# Altium PCB squareatron.PcbDoc
Units mm, origin at the board's own origin, x right, y up, seen from the top; angles counter-clockwise.
Board outline 60 x 50.05 mm, 2 copper layers (Top Layer, Bottom Layer), stack 1.58 mm thick; 51 components, 26 nets, 162 pads, 98 vias.
Unrouted connection lines stored in the file: 4.
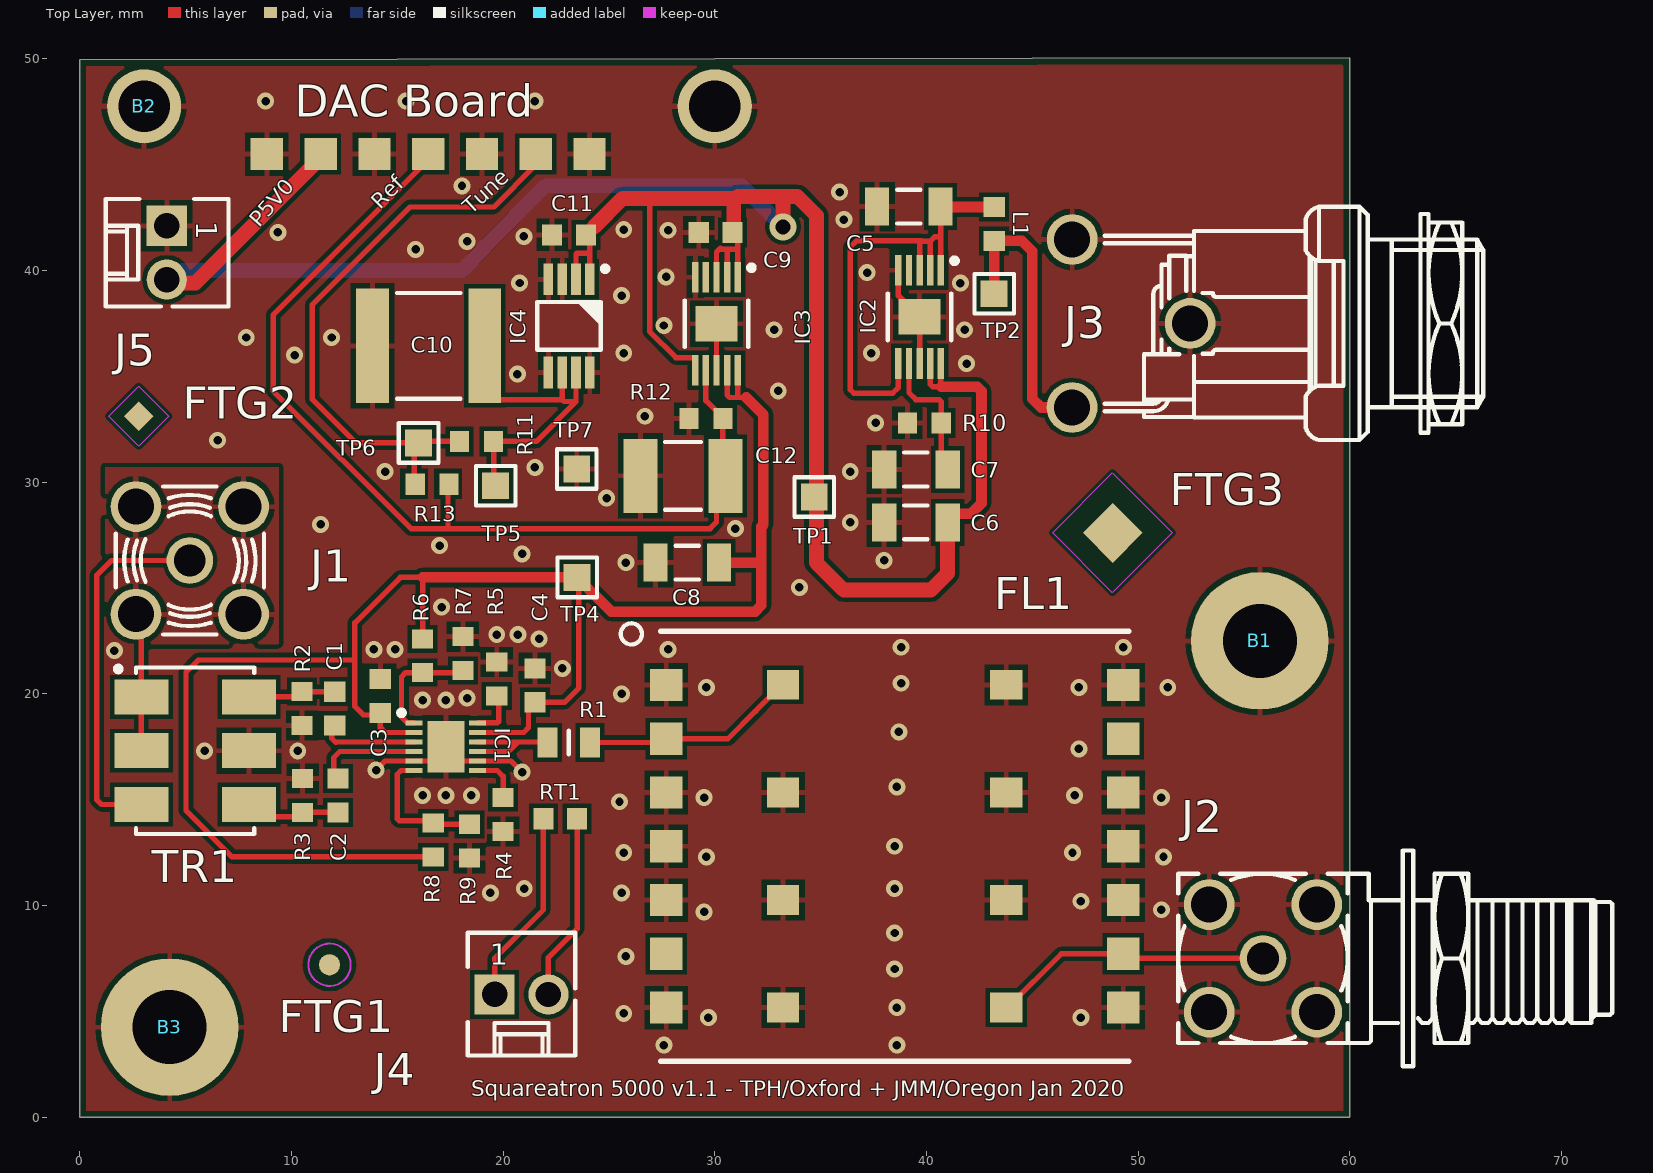
[diagram p0: Top Layer view]
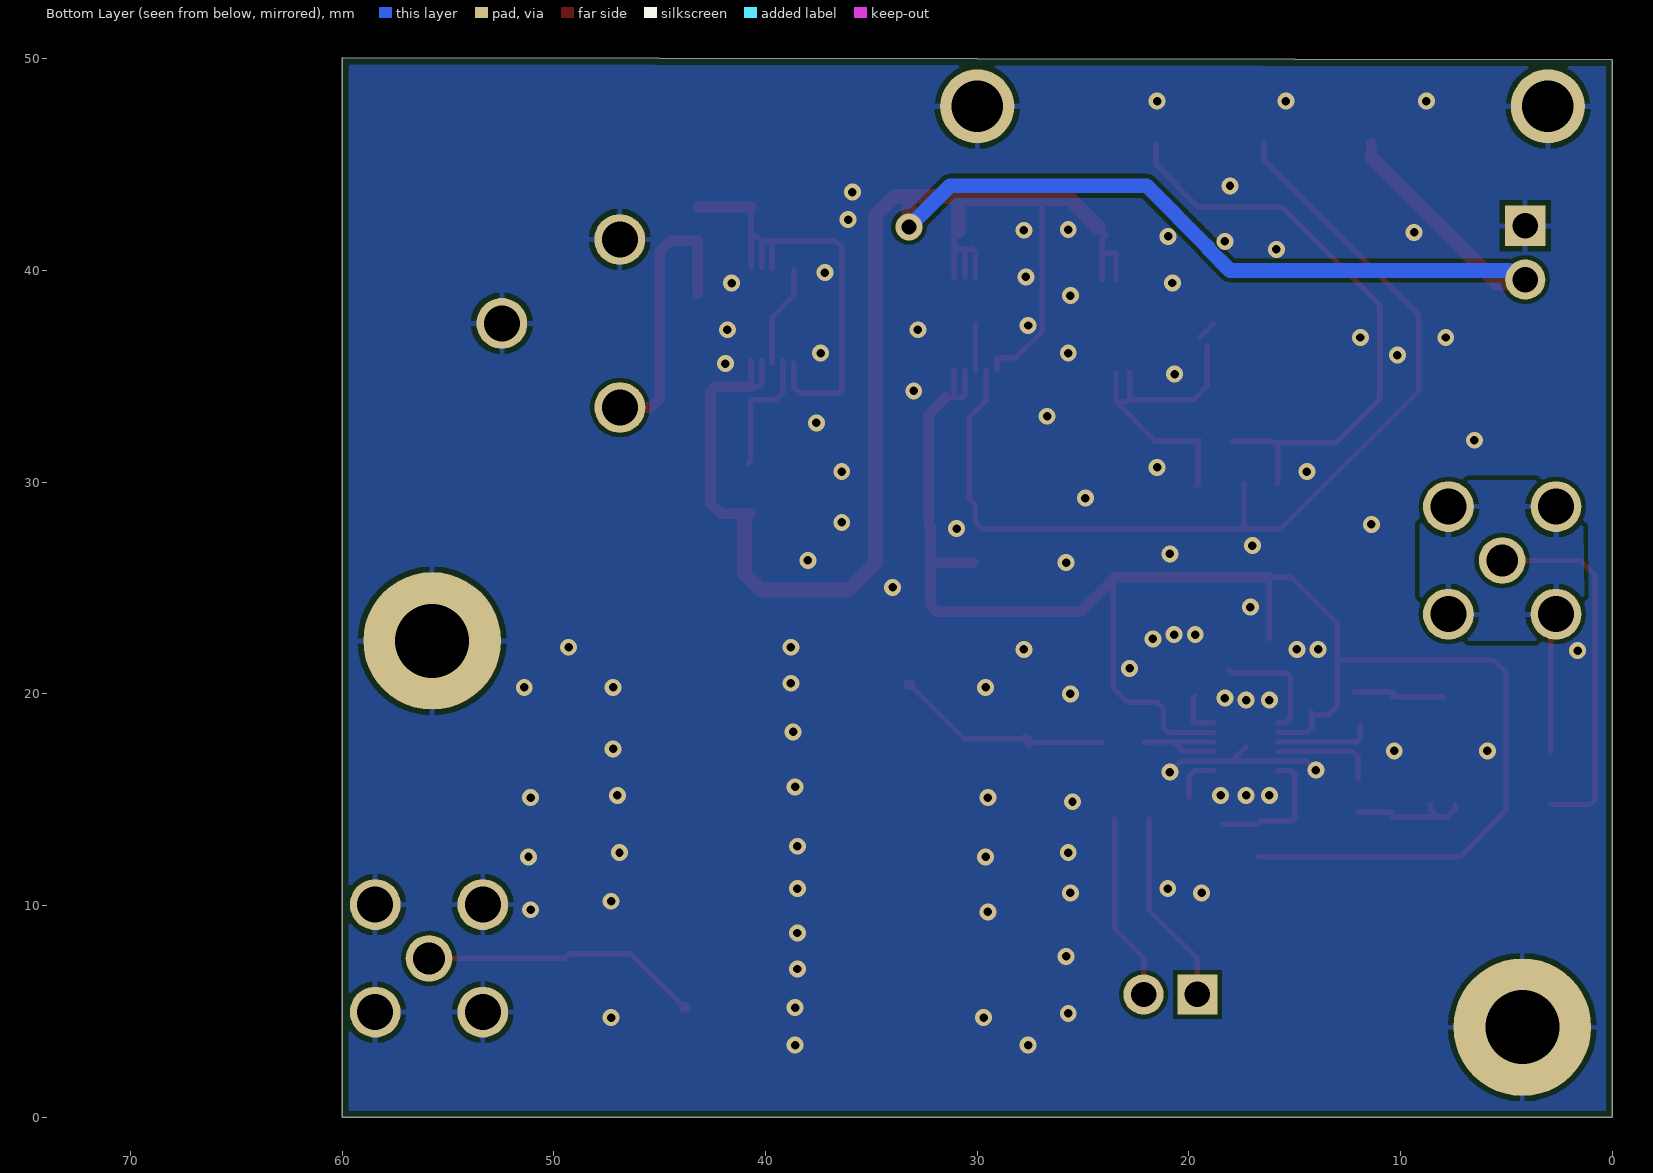
[diagram p1: Bottom Layer view, seen from below]
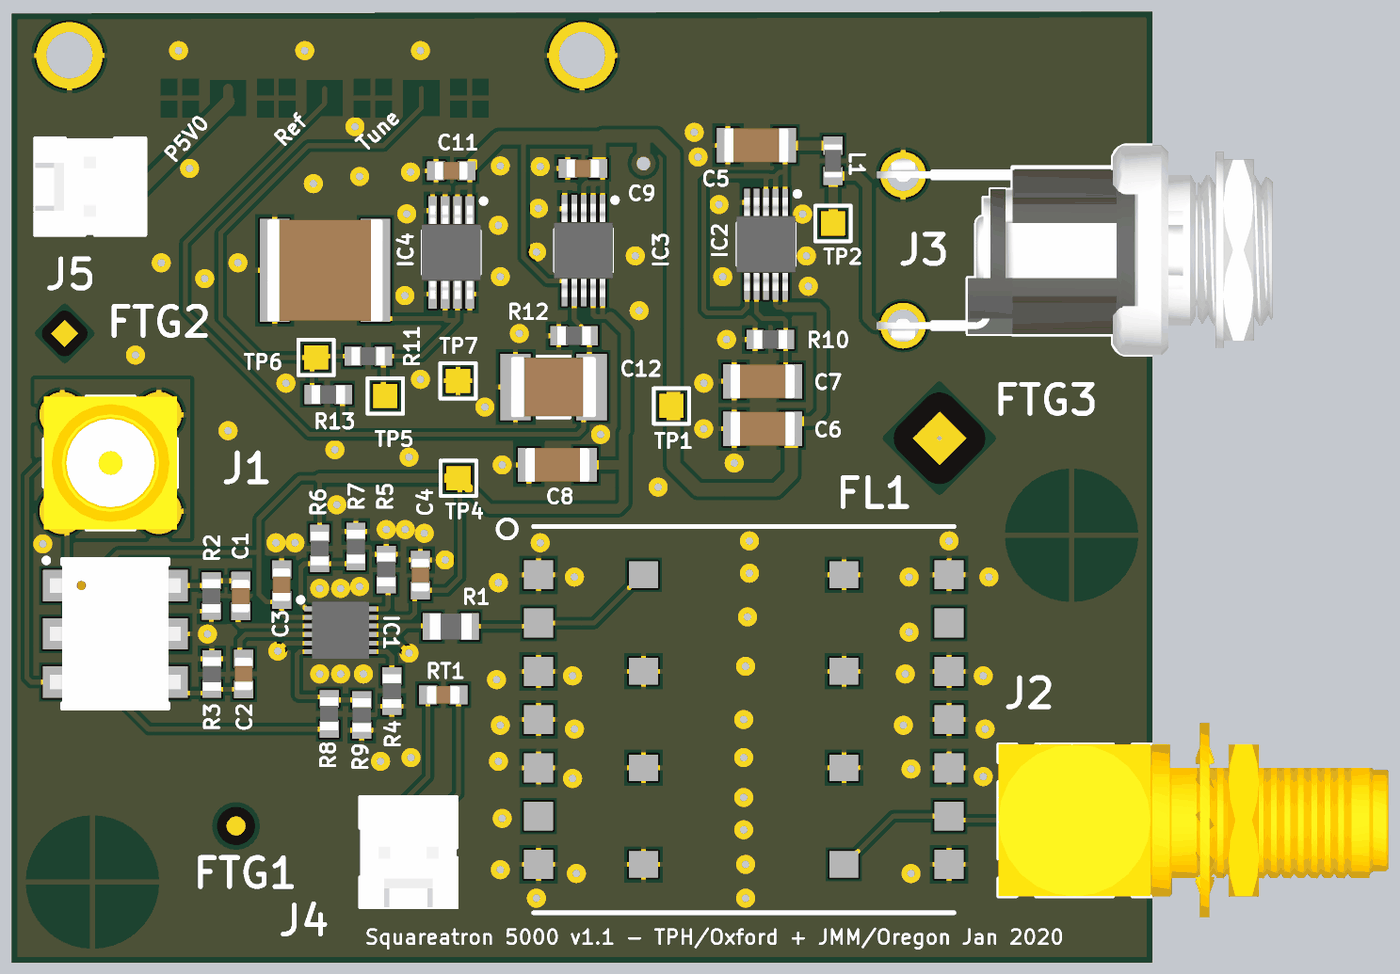
[diagram p2: 3D render of the assembled board from above, using the file's embedded part models]

## Layer stack, top to bottom
Top Solder: solder mask 0.0102, Solder Resist, Dk 3.5
Top Layer: signal copper 0.0356
Dielectric 1: dielectric 1.5088, FR-4, Dk 4.5
Bottom Layer: signal copper 0.0356
Bottom Solder: solder mask 0.0102, Solder Resist, Dk 3.5

## Board outline
0,0 60,0 60,50.05 0,49.95

## Design rules (kind name [scope] priority, off if disabled: settings)
BoardOutlineClearance BoardOutlineClearance_1 [OnLayer('Top Overlay')] p1: gap=0 ignorepadtopadclearanceinfootprint=FALSE
BoardOutlineClearance [All] p2: gap=0.254 ignorepadtopadclearanceinfootprint=FALSE except(0: Arc-SplitContinuation Track-SplitContinuation SMDPad-SplitContinuation THPad-SplitContinuation Via-SplitContinuation Fill-SplitContinuation Poly-SplitContinuation Region-SplitContinuation Text-SplitContinuation; 0.3: Arc-OutlineEdge Track-OutlineEdge SMDPad-OutlineEdge THPad-OutlineEdge Via-OutlineEdge Fill-OutlineEdge Poly-OutlineEdge Region-OutlineEdge Text-OutlineEdge)
Clearance [All] p1: gap=0.152 ignorepadtopadclearanceinfootprint=FALSE except(0.2: Arc-Poly Track-Poly SMDPad-Poly THPad-Poly Via-Poly Fill-Poly Poly-Poly)
HoleSize [All] p1: absolutevalues=TRUE maxlimit=5 minlimit=0.2 maxpercent=80.000 minpercent=20.000
MinimumAnnularRing [All] p1: minimumring=0.152
MinimumSolderMaskSliver [All] p1: minsoldermaskwidth=0
PolygonConnect "via plane connect" [IsVia] p1: connectstyle=Direct reliefconductorwidth=0.254 reliefentries=4 polygonreliefangle="90 Angle" airgapwidth=0.254
PolygonConnect PolygonConnect_1 [All] p2: connectstyle=Relief reliefconductorwidth=0.254 reliefentries=4 polygonreliefangle="90 Angle" airgapwidth=0.254
RoutingVias [All] p1: holewidth=0.711 width=1.27 viastyle="Through Hole" minholewidth=0.711 minwidth=1.27 maxholewidth=0.711 maxwidth=1.27
SilkToSilkClearance [All] p1: silktosilkclearance=0.15
SilkToSolderMaskClearance [IsPad] p1: minsilkscreentomaskgap=0 clearancetoexposedcopper=TRUE
SolderMaskExpansion [All] p1: expansion=0.102
Width [All] p1: maxlimit=0.5 minlimit=0.254 preferedwidth=0.254 minimp=50.000000 maximp=50.000000 favimp=50.000000
26 further rules are at their usual default settings.

## Classes and differential pairs
component class squareatron: B1 B2 B3 C1 C2 C3 C4 C5 C6 C7 C8 C9 C11 FTG1 FTG2 FTG3 IC1 IC2 IC3 IC4 J1 J2 J3 J4 L1 R1 R2 R3 R4 R5 R6 R7 R8 R9 R10 R11 R12 RT1 TP1 TP2 TP4 TP5 TP6 TP7 TR1
net class 50_Ohms: NetFL1_2 NetFL1_9

## Components (designator, comment, footprint, x,y, rotation, side; value= is the part's Value field where it differs from the comment)
B1 "Plated Hole" MTG350_650#1 66.35,31.65 r0 top
B2 "Plated Hole" MTG350_650#2 2.49,52.45 r0 top
B3 "Plated Hole" MTG350_650#3 65.9,46.1 r0 top
C1 "100nF" CAPC1608X87N 12.05,19.3 r270 top
C2 "100nF" CAPC1608X87N 12.2,15.2 r90 top
C3 "100nF" CAPC1608X87N 14.2,19.9 r270 top
C4 "100nF" CAPC1608X87N 21.5,20.4 r270 top
C5 "10uF" CAPC3216X180N 39.168,43.016 r0 top
C6 "4.7uF" CAPC3216X180N 39.5,28.1 r0 top
C7 "4.7uF" CAPC3216X180N 39.5,30.6 r0 top
C8 "4.7uF" CAPC3216X180N 28.7,26.2 r0 top
C9 "100nF" CAPC1608X87N 30.044,41.8 r0 top
C10 "Comment" CAPC5750X279N 16.485,36.438 r0 top
C11 "100nF" CAPC1608X87N 23.119,41.681 r0 top
C12 "Comment" CAPC4532X165N 28.5,30.3 r0 top
"DAC Board" "Comment" PCBComponent_1 16.561,56.216 r90 top
FL1 "Comment" "Dual Filter Footprint" 38.5,12.8 r0 top
FTG1 "Use only in PCB" FIDUCIAL_TOP_C100-200 11.8,7.2 r90 top
FTG2 "Use only in PCB" FIDUCIAL_TOP_S100-200 2.787,33.114 r90 top
FTG3 "Use only in PCB" FIDUCIAL_TOP_S200-400 48.8,27.6 r0 top
IC1 "LTC6957IDD-3#PBF" SON45P300X300X80-13N-R175X248 17.3,17.5 r0 top
IC2 "LT3042EMSE#PBF" SOP50P490X110-11N-R168X198 39.676,37.809 r270 top
IC3 "LT3042EMSE#PBF" SOP50P490X110-11N-R168X198 30.082,37.482 r270 top
IC4 "LTC6655BHMS8-3.3#PBF" SOP65P490X110-8N 23.119,37.381 r270 top
J1 "SMA" AMPHENOL_132134 5.2,26.3 r90 top
J2 "SMA" AMPHENOL_132203 55.9,7.5 r0 top locked
J3 "Jack" SWITCHCRAFT_712RA 52.46,37.5 r90 top locked
J4 "KK®" MOLEX_22-27-2021 20.87,5.798 r0 top
J5 "KK®" MOLEX_22-27-2021 4.112,40.838 r270 top (schematic designator J4)
L1 "120R@100MHz" INDC1608X95N 43.2,42.2 r90 top
R1 "36R5" RESC2012X60N 23.1,17.7 r0 top
R2 "49R9" RESC1608X55N 10.5,19.3 r90 top
R3 "49R9" RESC1608X55N 10.527,15.2 r270 top
R4 "0" RESC1608X55N 20,14.3 r90 top
R5 "0" RESC1608X55N 19.7,20.7 r270 top
R6 "0" RESC1608X55N 16.2,21.8 r90 top
R7 "0" RESC1608X55N 18.1,21.9 r270 top
R8 "0" RESC1608X55N 16.7,13.1 r270 top
R9 "0" RESC1608X55N 18.413,13.037 r90 top
R10 "49k9" RESC1608X55N 39.9,32.8 r0 top
R11 "1k" RESC1608X55N 18.75,31.927 r180 top
R12 "33k2" RESC1608X55N 29.582,33 r0 top
R13 "0" RESC1608X55N 16.65,29.898 r0 top (schematic designator R6)
RT1 "10k" THERMC1608X90N 22.7,14.1 r180 top
TP1 "Test Point" TPS127 34.7,29.3 r270 top
TP2 "Test Point" TPS127 43.2,38.9 r0 top
TP4 "Test Point" TPS127 23.5,25.5 r0 top
TP5 "Test Point" TPS127 19.65,29.827 r0 top
TP6 "Test Point" TPS127 16.009,31.854 r0 top
TP7 "Test Point" TPS127 23.478,30.624 r0 top
TR1 "1:2" XFMR_MINI-CIRCUITS_CD542 5.453,17.313 r270 top

## Footprints (in the part's own frame and the unit in brackets; to place one, negate y for a bottom-side part, rotate by r counter-clockwise, add the part's x,y. Pads: shape width x height; smd on the part's side, far side on the other; paste and mask are expansions set on the pad)
AMPHENOL_132134 [mm] "50 Ohm Through Hole SMA Straight PCB Jack"
  round 2.2 hole 1.5: 1(0,0)
  round 2.4 hole 1.7: 2(-2.54,-2.54) 2(-2.54,2.54) 2(2.54,-2.54) 2(2.54,2.54)
  silkscreen extent -3.5,-3.5 3.5,3.5, body extent -3.5,-3.5 3.5,3.5, height 9.53
AMPHENOL_132203 [mm] "50 Ohm Through Hole SMA Right Angle PCB Jack"
  round 2.2 hole 1.5: 1(0,0)
  round 2.4 hole 1.7: 2(-2.54,-2.54) 2(-2.54,2.54) 2(2.54,-2.54) 2(2.54,2.54)
  silkscreen extent -4,-5.1 16.5,5.1, body extent -4,-5.1 16.5,5.1, height 11.45
CAPC1608X87N [mm] "Chip Capacitor, Body 1.6x0.8mm IPC Medium Density"
  rect 0.95x1 smd: 1(-0.8,0) 2(0.8,0)
  body extent -0.87,-0.47 0.88,0.48, height 0.87
CAPC3216X180N [mm] "Chip Capacitor, Body 3.2x1.6mm, IPC Medium Density"
  rect 1.15x1.8 smd: 1(-1.5,0) 2(1.5,0)
  silkscreen extent -0.55,-0.8 0.55,0.8, body extent -1.7,-0.9 1.7,0.9, height 1.8
CAPC4532X165N [mm] "Capacitor, Non-Polarized, Chip; 4.50mm L X 3.20mm W X 1.65mm H, IPC Medium Density"
  rect 1.6x3.5 smd: 1(-2,0) 2(2,0)
  silkscreen extent -0.85,-1.6 0.85,1.6, body extent -2.25,-1.6 2.25,1.6, height 1.65
CAPC5750X279N [mm] "Chip Capacitor, 2-Leads, Body 5.7x5.0mm, IPC Medium Density"
  rect 1.55x5.4 smd: 1(-2.65,0) 2(2.65,0)
  silkscreen extent -1.5,-2.5 1.5,2.5, body extent -3.05,-2.7 3.05,2.7, height 2.79
"Dual Filter Footprint" [mm]
  rect 1.524x1.524 smd: 1(-10.79,7.618) 2(-10.79,5.078) 3(-10.79,2.538) 4(-10.79,-0.002) 5(-10.79,-2.542) 6(-10.79,-5.082) 7(-10.79,-7.622) 8(10.8,-7.622) 9(10.8,-5.082) 10(10.8,-2.542) 11(10.8,-0.002) 12(10.8,2.538) 13(10.8,5.078) 14(10.8,7.618)
  rect 1.52x1.4 smd: 1(-5.27,7.62) 2(5.27,7.62) 3(-5.27,2.54) 4(5.27,2.54) 5(-5.27,-2.54) 6(5.27,-2.54) 7(-5.27,-7.62) 8(5.27,-7.62)
  silkscreen extent -12.94,-10.16 11.05,10.53
FIDUCIAL_TOP_C100-200 [mm] "Round Fiducial Target, Top Layer, 1.0mm, Top Solder 2.0mm, Keepout =2.0mm"
  round 1 smd paste-0.51 mask+0.5: FTG2(0,0)
  Top Layer keep-out circle w0.1: c0,0 r1
FIDUCIAL_TOP_S100-200 [mm] "Square Fiducial Target, Top Layer, 1.0mm, Top Solder 2.0mm, Keepout =2.0mm"
  rect 1x1 smd rot 45 paste-0.51 mask+0.5: 1(0,0)
  Top Layer keep-out region: 1.414,0 0,-1.414 -1.414,0 0,1.414
FIDUCIAL_TOP_S200-400 [mm] "Square Fiducial Target, Top Layer, 2.0mm, Top Solder 4.0mm, Keepout =4.0mm"
  rect 2x2 smd rot 45 paste-0.9 mask+1: 1(0,0)
  Top Layer keep-out region: -2.839,0.011 -0.011,2.839 2.818,0.011 -0.011,-2.818
INDC1608X95N [mm] "Chip Inductor, 2-Leads, EIA 0603, Metric 1608, Body 1.6x0.8mm, IPC Medium Density"
  rect 0.95x1 smd: 1(-0.8,0) 2(0.8,0)
  body extent -0.87,-0.47 0.88,0.48, height 0.95
MOLEX_22-27-2021 [mm] "2.54mm (.100\") Pitch KK® Header, Single Row, Vertical, 2 Circuits"
  rect 1.9x1.9 hole 1.2: 1(-1.27,0.002)
  round 1.9 hole 1.2: 2(1.27,-0.002)
  silkscreen extent -2.54,-2.88 2.54,2.92, body extent -2.54,-2.88 2.54,2.92, height 11.7
MTG350_650#1 [mm] "Plated Through Hole: Hole Dia.=3.5mm Pad Dia.=6.5mm"
  round 6.5 hole 3.5: 1(-10.6,-9.15)
MTG350_650#2 [mm] "Plated Through Hole: Hole Dia.=3.5mm Pad Dia.=6.5mm"
  round 3.5 hole 2.43: 1(0.55,-4.7)
MTG350_650#3 [mm] "Plated Through Hole: Hole Dia.=3.5mm Pad Dia.=6.5mm"
  round 6.5 hole 3.5: 1(-61.65,-41.85)
PCBComponent_1 [mil]
  rect 60x60 smd: 1(-421.89,303.98) 2(-421.89,203.98) 3(-421.89,103.98) 4(-421.89,3.98) 5(-421.89,-96.02) 6(-421.89,-196.02) 7(-421.89,-296.02)
RESC1608X55N [mm] "Chip Resistor, EIA 0603, Metric 1608, Body 1.6x0.8mm, IPC Medium Density"
  rect 0.9x1 smd: 1(-0.8,0) 2(0.8,0)
  body extent -0.87,-0.47 0.88,0.48, height 0.55
RESC2012X60N [mm] "Chip Resistor, EIA 0805, Metric 2012, Body 2.0x1.2mm, IPC Medium Density"
  rect 0.95x1.4 smd: 1(-1,0) 2(1,0)
  silkscreen extent 0,-0.55 0,0.55, body extent -1.1,-0.67 1.1,0.68, height 0.6
SON45P300X300X80-13N-R175X248 [mm] "SON, 0.45mm Pitch; 12 Pin, 3.00mm W X 3.00mm L X 0.80mm H Body (w/Thermal tab 1.75 x 2.48mm), IPC Medium Density"
  rect 0.8x0.25 smd: 1(-1.5,1.125) 2(-1.5,0.675) 3(-1.5,0.225) 4(-1.5,-0.225) 5(-1.5,-0.675) 6(-1.5,-1.125) 7(1.5,-1.125) 8(1.5,-0.675) 9(1.5,-0.225) 10(1.5,0.225) 11(1.5,0.675) 12(1.5,1.125)
  rect 1.75x2.45 smd paste-0.37: 13(0,0)
  silkscreen extent -2.22,1.48 -1.97,1.72, body extent -1.5,-1.5 1.5,1.5, height 0.8
SOP50P490X110-11N-R168X198 [mm] "SOP, 0.50mm, Pitch; 10 pin, 3.00mm W X 3.00mm L X 1.10mm H body (w/thermal tab  1.68 X 1.98 mm), IPC Medium Density"
  rect 1.45x0.3 smd: 1(-2.2,1) 2(-2.2,0.5) 3(-2.2,0) 4(-2.2,-0.5) 5(-2.2,-1) 6(2.2,-1) 7(2.2,-0.5) 8(2.2,0) 9(2.2,0.5) 10(2.2,1)
  rect 1.68x1.98 smd: 11(0,0)
  silkscreen extent -2.77,-1.5 1.1,1.78, body extent -2.45,-1.55 2.45,1.55, height 1.1
SOP65P490X110-8N [mm] "SOP, 0.65mm pitch; 8 pin, 3.00mm W X 3.00mm L X 1.10mm H body, IPC Medium Density"
  rect 1.5x0.45 smd: 1(-2.2,0.975) 2(-2.2,0.325) 3(-2.2,-0.325) 4(-2.2,-0.975) 5(2.2,-0.975) 6(2.2,-0.325) 7(2.2,0.325) 8(2.2,0.975)
  silkscreen extent -2.82,-1.5 1.12,1.83, body extent -2.45,-1.55 2.45,1.55, height 1.1
SWITCHCRAFT_712RA [mm] "2.5 mm Center Pin, 5A, 48VDC, Right Angle, Through Hole, Locking Power Jack Connector (Threaded Bushings)"
  round 2.4 hole 1.7: 1(-3.972,5.578) 2(0,0) 3(3.965,5.573)
  silkscreen extent -5.51,-13.85 5.51,4.04, body extent -5.51,-13.85 5.51,6.96, height 13.89
THERMC1608X90N [mm] "PTC Thermistors, Chip; 1.6mm L X 0.8mm W X 0.9mm H, IPC Medium Density"
  rect 0.95x1 smd: 1(-0.8,0) 2(0.8,0)
  body extent -0.87,-0.47 0.88,0.48, height 0.9
TPS127 [mm] "1.27 x  1.27mm SMD Test Point Area"
  rect 1.27x1.27 smd paste-1.27: 1(0,0)
  silkscreen extent -0.94,-0.94 0.94,0.94
XFMR_MINI-CIRCUITS_CD542 [mm] "MINI-CIRCUITS RF Transformer, Case CD542 - Body 7.87 X 5.58mm"
  rect 1.65x2.54 smd: 1(-2.54,-2.54) 2(0,-2.54) 3(2.54,-2.54) 4(2.54,2.54) 5(0,2.54) 6(-2.54,2.54)
  silkscreen extent -3.99,-3.76 3.94,2.79, body extent -3.93,-3.45 3.94,3.45, height 2.84

## Part data
B1 B2 B3: library part PLATED_HOLE3.5_PAD6.5, "Single Terminal Socket", Author="CERN DEM JLC", ComponentHeight=0mm, Component Type="Standard (No BOM)", CreateDate=20/11/2008, Family="Plated Hole", HelpURL=Undefined, LatestRevisionDate=23/11/2011, Mounted=No, PackageDescription="Plated Through Hole: Hole Dia.=3.5mm Pad Dia.=6.5mm", Part Description="Plated Through Hole: Hole Dia.=3.5mm Pad Dia.=6.5mm", Part Number=PLATED_HOLE3.5_PAD6.5, Pin Count=1, Sense=No, SMD=No, Socket=No, Status=None
C1 C2 C3 C4 C9 C11: library part CC0603_100NF_50V_10%_X7R, "Non-polarised capacitor", Case=0603, Manufacturer=GENERIC, Manufacturer1 ComponentHeight=0.87mm, Manufacturer1 Example=PHYCOMP, Manufacturer1 Part Number=223858615649, Tolerance=±10%, Voltage=50V, Author="CERN DEM JLC", Component Type=Standard, CreateDate=03/12/2007, HelpURL=\\cern.ch\dfs\Applications\Altium\Datasheets\CC0603_X7R_PHYCOMP.pdf, LatestRevisionDate=03/12/2007, Manufacturer Part Number=CC0603_100NF_50V_10%_X7R, Mounted=Yes, Part Description="SMD Multilayer Chip Ceramic Capacitor", Part Number=CC0603_100NF_50V_10%_X7R, Pin Count=2, Sense=No, SMD=Yes, Socket=No, Status=Preferred, TC=X7R
C5: library part CC1206_10UF_25V_10%_X7R, "Non-polarised capacitor", Case=1206, Manufacturer=GENERIC, Manufacturer1 ComponentHeight=1.8mm, Manufacturer1 Example=KEMET, Manufacturer1 Part Number=C1206C106K4RACTU, Manufacturer Part Number=CC1206_10uF_25V_10%_X7R, Tolerance=±10%, Voltage=25V, Author="CERN DEM JLC", Component Type=Standard, CreateDate=12/09/2012, HelpURL=\\cern.ch\dfs\Applications\Altium\Datasheets\CC1206_X7R_KEMET.pdf, LatestRevisionDate=12/09/2012, Mounted=Yes, Part Description="SMD Multilayer Chip Ceramic Capacitor", Part Number=CC1206_10UF_25V_10%_X7R, Pin Count=2, Sense=No, SMD=Yes, Socket=No, Status=Preferred, TC=X7R
C6 C7 C8: library part CC1206_4.7UF_16V_10%_X5R, "Non-polarised capacitor", Case=1206, Manufacturer=GENERIC, Manufacturer1 ComponentHeight=1.8mm, Manufacturer1 Example=KEMET, Manufacturer1 Part Number=C1206C475K4PAC, Tolerance=±10%, Voltage=16V, Author="CERN DEM JLC", Component Type=Standard, CreateDate=03/12/2007, HelpURL=\\cern.ch\dfs\Applications\Altium\Datasheets\CC1206_X5R_KEMET.pdf, LatestRevisionDate=03/12/2007, Manufacturer Part Number=CC1206_4.7UF_16V_10%_X5R, Mounted=Yes, Part Description="SMD Multilayer Chip Ceramic Capacitor", Part Number=CC1206_4.7UF_16V_10%_X5R, Pin Count=2, Sense=No, SMD=Yes, Socket=No, Status=Preferred, TC=X5R
FTG1: library part FIDUCIAL_TARGET_C100-200, "Fiducial Target", Author="CERN DEM JLC", ComponentHeight=0mm, Component Type="Standard (No BOM)", CreateDate=09.02.2010, Family=Fiducial, HelpURL=Undefined, LatestRevisionDate=04.04.2012, Mounted=No, PackageDescription="Round Fiducial Target, Top Layer, 1.0mm, Top Solder 2.0mm, Keepout =2.0mm", Part Description="Round Fiducial Target, Top Layer, 1.0mm, Top Solder 2.0mm, Keepout =2.0mm", Part Number=FIDUCIAL_TARGET_C100-200, Pin Count=1, Sense=No, SMD=Yes, Socket=No, Status=None
FTG2: library part FIDUCIAL_TARGET_S100-200, "Fiducial Target", Author="CERN DEM JLC", ComponentHeight=0mm, Component Type="Standard (No BOM)", CreateDate=09.02.2010, Family=Fiducial, HelpURL=Undefined, LatestRevisionDate=04.04.2012, Mounted=No, PackageDescription="Square Fiducial Target, Top Layer, 1.0mm, Top Solder 2.0mm, Keepout =2.0mm", Part Description="Square Fiducial Target, Top Layer, 1.0mm, Top Solder 2.0mm, Keepout =2.0mm", Part Number=FIDUCIAL_TARGET_S100-200, Pin Count=1, Sense=No, SMD=Yes, Socket=No, Status=None
FTG3: library part FIDUCIAL_TARGET_S200-400, "Fiducial Target", Author="CERN DEM JLC", ComponentHeight=0mm, Component Type="Standard (No BOM)", CreateDate=02.06.2008, Family=Fiducial, HelpURL=Undefined, LatestRevisionDate=04.04.2012, Mounted=No, PackageDescription="Square Fiducial Target, Top Layer, 2.0mm, Top Solder 4.0mm, Keepout =4.0mm", Part Description="Square Fiducial Target, Top Layer, 2.0mm, Top Solder 4.0mm, Keepout =4.0mm", Part Number=FIDUCIAL_TARGET_S200-400, Pin Count=1, Sense=No, SMD=Yes, Socket=No, Status=None
IC1: "Low Phase Noise, Dual Output Buffer/Driver/Logic Converter, CMOS Logic, In-Phase Outputs", Case=SON12, Manufacturer="LINEAR TECHNOLOGY", Author="CERN DEM JMW", Bonding=No, ComponentHeight=0.8mm, Component Type=Standard, CreateDate=08/08/2016, Device=LTC6957IDD-3#PBF, HelpURL=\\cern.ch\dfs\Applications\Altium\Datasheets\LTC6957IDD-3#PBF.pdf, LatestRevisionDate=07/12/2016, Manufacturer Part Number=LTC6957IDD-3#PBF, Mounted=Yes, PackageDescription="SON, 0.45mm Pitch; 12 Pin, 3.00mm W X 3.00mm L X 0.80mm H Body (w/Thermal tab 1.75 x 2.48mm), IPC Medium Density", Part Description="Low Phase Noise, Dual Output Buffer/Driver/Logic Converter, CMOS Logic, In-Phase Outputs", Part Number=LTC6957IDD-3#PBF, Pin Count=13, PressFit=No, Sense=No, SMD=Yes, Socket=No
IC2 IC3: "20V, 200mA, Ultralow Noise, Ultrahigh PSRR RF Linear Regulator", Case=MSOP10, Manufacturer="LINEAR TECHNOLOGY", Author="CERN DEM MR", Bonding=No, ComponentHeight=1.1mm, Component Type=Standard, CreateDate=09/06/2016, Device=LT3042EMSE#PBF, HelpURL=\\cern.ch\dfs\Applications\Altium\Datasheets\LT3042EMSE#PBF.pdf, LatestRevisionDate=09/06/2016, Manufacturer Part Number=LT3042EMSE#PBF, Mounted=Yes, PackageDescription="SOP, 0.50mm, Pitch; 10 pin, 3.00mm W X 3.00mm L X 1.10mm H body (w/thermal tab  1.68 X 1.98 mm), IPC Medium Density", Part Description="20V, 200mA, Ultralow Noise, Ultrahigh PSRR RF Linear Regulator", Part Number=LT3042EMSE#PBF, Pin Count=11, PressFit=No, Sense=No, SMD=Yes, Socket=No
IC4: "0.25ppm Noise, Low Drift Precision Buffered Voltage Reference", Case=SSOP8, Manufacturer="LINEAR TECHNOLOGY", Author="CERN DEM BC", Bonding=No, ComponentHeight=1.1mm, Component Type=Standard, CreateDate=03/03/2016, Device=LTC6655BHMS8-3.3#PBF, HelpURL=\\cern.ch\dfs\Applications\Altium\Datasheets\LTC6655BHMS8-3.3#PBF.pdf, LatestRevisionDate=22/11/2016, Manufacturer Part Number=LTC6655BHMS8-3.3#PBF, Mounted=Yes, PackageDescription="SOP, 8-Leads, Body 3.1x3.1mm (max), Pitch 0.65mm, IPC Medium Density", Part Description="3V3, 0.25ppm Noise, Low Drift Precision Buffered Voltage Reference", Part Number=LTC6655BHMS8-3.3#PBF, Pin Count=8, PressFit=No, Sense=No, SMD=Yes, Socket=No
J1: library part AMPHENOL_132134, Manufacturer=AMPHENOL, Manufacturer Part Number=132134, Author="CERN DEM JLC", ComponentHeight=9.53mm, Component Type=Standard, CreateDate=16/12/2013, Family=SMA, HelpURL=\\cern.ch\dfs\Applications\Altium\Datasheets\AMPHENOL_132134.pdf, LatestRevisionDate=16/12/2013, Mounted=Yes, Part Description="50 Ohm Through Hole SMA Straight PCB Jack", Part Number=AMPHENOL_132134, Pin Count=4, PressFit=No, Sense=No, SMD=No, Socket=No, Status=None
J2: library part AMPHENOL_132203, Manufacturer=AMPHENOL, Manufacturer Part Number=132203, Author="CERN DEM MR", ComponentHeight=10.44mm, Component Type=Standard, CreateDate=06/10/2016, Family=SMA, HelpURL=\\cern.ch\dfs\Applications\Altium\Datasheets\AMPHENOL_132203.pdf, LatestRevisionDate=06/10/2016, Mounted=Yes, Part Description="50 Ohm Through Hole SMA Right Angle PCB Jack", Part Number=AMPHENOL_132203, Pin Count=5, PressFit=No, Sense=No, SMD=No, Socket=No, Status=None
J3: library part SWITCHCRAFT_712RA, "2.5 mm Center Pin, 5A, 48V, Right Angle, Through Hole, , DC Power Jack Connector", Manufacturer=SWITCHCRAFT, Manufacturer Part Number=712RA, Author="CERN DEM JLC", ComponentHeight=13.8mm, Component Type=Standard, CreateDate=19/12/2017, Family=Jack, HelpURL=\\cern.ch\dfs\Applications\Altium\Datasheets\SWITCHCRAFT_712RA.pdf, LatestRevisionDate=19/12/2017, Mounted=Yes, Part Description="2.5 mm Center Pin, 5A, 48VDC, Right Angle, Through Hole, Locking Power Jack Connector (Threaded Bushings)", Part Number=SWITCHCRAFT_712RA, Pin Count=3, PressFit=No, Sense=No, SMD=No, Socket=No, Status=None
J4 J5: library part MOLEX_22-27-2021, "Connector 2 Male", Manufacturer=MOLEX, Manufacturer Part Number=22-27-2021, Author="CERN DEM JLC", ComponentHeight=11.7mm, Component Type=Standard, CreateDate=04/12/2008, Family=KK®, HelpURL=\\cern.ch\dfs\Applications\Altium\Datasheets\MOLEX_22-27-2021.pdf, LatestRevisionDate=04/12/2008, Mounted=Yes, Part Description="2.54mm (.100\") Pitch KK® Wire-to-Board Header, Vertical, with Friction Lock, 2 Circuits, Tin (Sn) Plating", Part Number=MOLEX_22-27-2021, Pin Count=2, PressFit=No, Sense=No, SMD=No, Socket=No, Status=None
L1: library part IND0603_MURATA_BLM18PG121SN1D, "Inductor", Case=0603, Manufacturer=MURATA, Manufacturer Part Number=BLM18PG121SN1D, Power=2A, Resistance=0.05R, Author="CERN DEM BC", ComponentHeight=0.95mm, Component Type=Standard, CreateDate=27/07/2015, HelpURL=\\cern.ch\dfs\Applications\Altium\Datasheets\IND0603_MURATA_BLM18P.pdf, LatestRevisionDate=27/07/2015, Mounted=Yes, Part Description="SMD EMIFIL Chip Ferrite Bead", Part Number=IND0603_MURATA_BLM18PG121SN1D, Pin Count=2, Sense=No, SMD=Yes, Socket=No, Status=None
R1: library part R0805_36R5_0.1%_0.1W_10PPM, "Resistor - 0.1%", Case=0805, Manufacturer=GENERIC, Manufacturer1 ComponentHeight=0.6mm, Manufacturer1 Example="TYCO HOLSWORTHY", Manufacturer1 Part Number=RN73C2A36R5BTG, Power=0.1W, Tolerance=±0.1%, Author="CERN DEM JLC", Component Type=Standard, CreateDate=03/12/2007, HelpURL=\\cern.ch\dfs\Applications\Altium\Datasheets\R0805_Tyco_RN73.pdf, LatestRevisionDate=13/03/2008, Manufacturer Part Number=R0805_36R5_0.1%_0.1W_10PPM, Mounted=Yes, Part Description="Thin Film Chip Resistor", Part Number=R0805_36R5_0.1%_0.1W_10PPM, Pin Count=2, PressFit=No, Sense=No, SMD=Yes, Socket=No, Status="Not Recommended", TC=±10ppm
R2 R3: library part R0603_49R9_0.1%_0.063W_10PPM, "Resistor - 0.1%", Case=0603, Manufacturer=GENERIC, Manufacturer1 ComponentHeight=0.5mm, Manufacturer1 Example="TYCO HOLSWORTHY", Manufacturer1 Part Number=RN73C1J49R9BTDF, Power=0.063W, Tolerance=±0.1%, Author="CERN DEM JLC", Component Type=Standard, CreateDate=03/12/2007, HelpURL=\\cern.ch\dfs\Applications\Altium\Datasheets\R0603_Tyco_RN73.pdf, LatestRevisionDate=13/03/2008, Manufacturer Part Number=R0603_49R9_0.1%_0.063W_10PPM, Mounted=Yes, Part Description="Thin Film Chip Resistor", Part Number=R0603_49R9_0.1%_0.063W_10PPM, Pin Count=2, PressFit=No, Sense=No, SMD=Yes, Socket=No, Status="Not Recommended", TC=±10ppm
R4 R5 R6 R7 R8 R9 R13: library part R0603_0R_JUMPER, "Resistor", Case=0603, Manufacturer=GENERIC, Manufacturer1 ComponentHeight=0.55mm, Manufacturer1 Example="NIC COMPONENT", Manufacturer1 Part Number=NRC06Z0, Author="CERN DEM JLC", Component Type=Standard, CreateDate=03/12/2007, HelpURL=\\cern.ch\dfs\Applications\Altium\Datasheets\R0603_NIC_NRC.pdf, LatestRevisionDate=13/03/2008, Manufacturer Part Number=R0603_0R_JUMPER, Part Description="1A (0.05R Max DC Resistance) Zero Ohm Jumper", Part Number=R0603_0R_JUMPER, Pin Count=2, PressFit=No, Sense=No, SMD=Yes, Socket=No, Status=Preferred
  R4 R5 R7 R8 R9: Mounted=Yes
  R6 R13: Mounted=No
R10: library part R0603_49K9_0.1%_0.063W_10PPM, "Resistor - 0.1%", Case=0603, Manufacturer=GENERIC, Manufacturer1 ComponentHeight=0.5mm, Manufacturer1 Example="TYCO HOLSWORTHY", Manufacturer1 Part Number=RN73C1J49K9BTDF, Power=0.063W, Tolerance=±0.1%, Author="CERN DEM JLC", Component Type=Standard, CreateDate=03/12/2007, HelpURL=\\cern.ch\dfs\Applications\Altium\Datasheets\R0603_Tyco_RN73.pdf, LatestRevisionDate=13/03/2008, Manufacturer Part Number=R0603_49K9_0.1%_0.063W_10PPM, Mounted=Yes, Part Description="Thin Film Chip Resistor", Part Number=R0603_49K9_0.1%_0.063W_10PPM, Pin Count=2, PressFit=No, Sense=No, SMD=Yes, Socket=No, Status="Not Recommended", TC=±10ppm
R11: library part R0603_1K_0.1%_0.063W_10PPM, "Resistor - 0.1%", Case=0603, Manufacturer=GENERIC, Manufacturer1 ComponentHeight=0.55mm, Manufacturer1 Example="TYCO HOLSWORTHY", Manufacturer1 Part Number=RN73C1J1K0BTG, Power=0.063W, Tolerance=±0.1%, Author="CERN DEM BC", Component Type=Standard, CreateDate=23/05/2016, HelpURL=\\cern.ch\dfs\Applications\Altium\Datasheets\R0603_Tyco_RN73.pdf, LatestRevisionDate=23/05/2016, Manufacturer Part Number=R0603_1K_0.1%_0.063W_10PPM, Mounted=Yes, Part Description="Thin Film Chip Resistor", Part Number=R0603_1K_0.1%_0.063W_10PPM, Pin Count=2, PressFit=No, Sense=No, SMD=Yes, Socket=No, Status="Not Recommended", TC=±10ppm
R12: library part R0603_33K2_0.1%_0.063W_10PPM, "Resistor - 0.1%", Case=0603, Manufacturer=GENERIC, Manufacturer1 ComponentHeight=0.5mm, Manufacturer1 Example="TYCO HOLSWORTHY", Manufacturer1 Part Number=RN73C1J33K2BTDF, Power=0.063W, Tolerance=±0.1%, Author="CERN DEM JLC", Component Type=Standard, CreateDate=03/12/2007, HelpURL=\\cern.ch\dfs\Applications\Altium\Datasheets\R0603_Tyco_RN73.pdf, LatestRevisionDate=13/03/2008, Manufacturer Part Number=R0603_33K2_0.1%_0.063W_10PPM, Mounted=Yes, Part Description="Thin Film Chip Resistor", Part Number=R0603_33K2_0.1%_0.063W_10PPM, Pin Count=2, PressFit=No, Sense=No, SMD=Yes, Socket=No, Status="Not Recommended", TC=±10ppm
RT1: library part THERM_NTC_10K_EPCOS_B57330V2103J260, "Thermistor NTC (Negative Temperature Coefficient)", Case=0603, Manufacturer=EPCOS, Manufacturer Part Number=B57330V2103J260, Power=180mW, Tolerance=±5%, Author="CERN DEM BC", ComponentHeight=0.9mm, Component Type=Standard, CreateDate=30/07/2015, HelpURL=\\cern.ch\dfs\Applications\Altium\Datasheets\THERM_EPCOS_B573xxV2.pdf, LatestRevisionDate=30/07/2015, Mounted=Yes, Part Description="SMD NTC Thermistor for Temperature Measurement", Part Number=THERM_NTC_10K_EPCOS_B57330V2103J260, Pin Count=2, Sense=No, SMD=Yes, Socket=No, Status=None
TP1 TP2 TP4 TP5 TP6 TP7: library part SMD_PAD_1.27X1.27MM, Author="CERN DEM JLC", ComponentHeight=0mm, Component Type="Standard (No BOM)", CreateDate=12/01/2008, Family="Test Point", HelpURL=Undefined, LatestRevisionDate=12/01/2008, Mounted=No, PackageDescription="1.27mm x 1.27mm PCB Copper Area (SMD Test Point)", Part Description="1.27mm x 1.27mm PCB Copper Area (SMD Test Point)", Part Number=SMD_PAD_1.27X1.27MM, Pin Count=1, Sense=No, SMD=Yes, Socket=No, Status=None
TR1: library part XFMR_MINI-CIRCUITS_ADT2-1T-1P+, "50 Ohms 8 To 600MHz RF Transformer", Manufacturer=MINI-CIRCUITS, Manufacturer Part Number=ADT2-1T-1P+, Author="CERN DEM MR", ComponentHeight=2.84mm, Component Type=Standard, CreateDate=06/09/2017, HelpURL=\\cern.ch\dfs\Applications\Altium\Datasheets\XFMR_MINI-CIRCUITS_ADT2-1T-1P+.pdf, LatestRevisionDate=06/09/2017, Mounted=Yes, Part Description="50 Ohms 8 To 600MHz RF Transformer", Part Number=XFMR_MINI-CIRCUITS_ADT2-1T-1P+, Pin Count=6, Sense=No, SMD=Yes, Socket=No, Status=None

## Free pads (board coordinates)
  round 3.5 hole 2.43: 1(30,47.75)

## Via types
v1: diameter 0.8, hole 0.4, Top Layer to Bottom Layer, 97 vias
v2: diameter 1.27, hole 0.711, Top Layer to Bottom Layer, 1 vias

## Nets (pads, with @x,y where several pads share a name; then routed paths per layer and width w, separated by ;. In a path a pad name is that pad's centre, name@x,y a point inside that pad or via, vN(x,y) a via of type N, cw(c..) or ccw(c..) an arc to the next point about the centre after c; other vN are vias at no path point)
FLTA: IC1.1 R6.1 R7.2 | length 5.6
  Top Layer w0.254: IC1.1 15.475,18.625 15.2,18.9 15.2,20.8 15.4,21 R6.1 18,21 R7.2
FLTB: IC1.6 R8.1 R9.2 | length 6.5
  Top Layer w0.254: IC1.6 15.175,16.375 15,16.2 15,14.1 15.1,14 16.6,14 R8.1 16.763,13.837 R9.2
GND: "DAC Board.1" "DAC Board.3" "DAC Board.5" "DAC Board.7" B1.1 B2.1 B3.1 C3.1 C4.1 C5.1 C6.1 C7.1 C8.1 C9.1 C10.1 C11.1 C12.1 FL1.1@27.71,20.418 FL1.2@43.77,20.42 FL1.3 FL1.4 FL1.5 FL1.6@43.77,10.26 FL1.7 FL1.8@49.3,5.178 FL1.10 FL1.11 FL1.12 FL1.14 IC1.5 IC1.8 IC1.13 IC2.5 IC2.8 IC2.11 IC3.5 IC3.8 IC3.11 IC4.3 IC4.4 IC4.5 IC4.8 J2.2 J3.2 J3.3 J5.1 pad.1 R2.1 R3.1 R4.1 R5.1 R7.1 R9.1 R10.1 R12.1 TP7.1 TR1.5 | length 15.3
  Top Layer w0.254: v1(14,16.4) 14.425,16.825 IC1.5 IC1.13@17.975,16.825 ; IC1.13 IC1.13@17.975,16.825 ; v1(20.9,16.3) 20.375,16.825 IC1.8 IC1.13@17.975,16.825 ; IC3.8 IC3.11 ; IC2.5 38.676,38.809 IC2.11 IC2.8
  other v1: 27.6,3.4 38.6,3.4 29.7,4.7 47.3,4.7 25.7,4.9 38.6,5.178 38.5,7 25.8,7.6 38.5,8.7 29.5,9.7 51.1,9.8 47.3,10.2 19.4,10.6 25.6,10.6 21,10.8 38.5,10.8 29.6,12.3 51.2,12.3 25.7,12.5 46.9,12.5 38.5,12.8 25.5,14.9 29.5,15.1 51.1,15.1 16.2,15.2 17.3,15.2 18.5,15.2 47,15.2 38.6,15.6 5.9,17.3 10.3,17.3 47.2,17.4 38.7,18.2 16.2,19.7 17.3,19.7 18.3,19.8 25.6,20 29.6,20.3 47.2,20.3 51.4,20.3 38.8,20.5 22.8,21.2 1.638,22.045 13.9,22.1 14.9,22.1 27.8,22.1 38.8,22.2 49.3,22.2 21.7,22.6 19.7,22.8 20.7,22.8 17.1,24.1 34,25.03 25.8,26.197 38,26.3 20.9,26.608 17,27 30.975,27.803 11.38,28 36.4,28.1 24.888,29.242 14.425,30.5 36.4,30.5 21.5,30.7 6.511,31.979 37.6,32.8 26.7,33.114 33,34.314 20.678,35.108 41.9,35.6 10.153,36 25.7,36.1 37.4,36.1 7.867,36.834 11.9,36.834 32.8,37.2 41.8,37.2 27.6,37.4 25.6,38.809 41.6,39.4 20.778,39.408 27.7,39.7 37.2,39.9 15.868,41 18.3,41.376 20.978,41.608 9.357,41.8 27.8,41.9 25.7,41.931 36.1,42.4 35.9,43.7 18.059,44 8.777,48 15.415,48 21.5,48
NetC1_1: C1.1 R2.2 TR1.6 | length 4.4
  Top Layer w0.254: TR1.6 10.153,19.853 10.4,20.1 C1.1 C1.1@12.2,20.1 ; R2.2@10.353,19.853 R2.2@10.4,19.9
NetC1_2: C1.2 IC1.3 | length 4.6
  Top Layer w0.254: C1.2@11.9,18.5 11.9,17.9 12.1,17.7 12.125,17.725 IC1.3
NetC2_1: C2.1 R3.2 TR1.4 | length 5.7
  Top Layer w0.254: TR1.4@7.422,14.773 7.422,14.536 7.756,14.201 10.4,14.201 10.4,14.4 C2.1@12,14.4 ; TR1.4@8.397,14.369 8.592,14.563 TR1.4@8.592,14.8
NetC2_2: C2.2 IC1.4 | length 4.9
  Top Layer w0.254: C2.2@12,16 12,16.992 12.283,17.275 IC1.4
NetC5_2: C5.2 IC2.1 IC2.2 IC2.3 IC2.6 L1.2 | length 22.8
  Top Layer w0.254: IC2.6 38.676,34.476 38.4,34.2 36.572,34.2 36.4,34.372 36.4,41.1 36.7,41.4 39.764,41.4 39.788,41.376 ; IC2.3@39.676,40.136 39.676,41.264 39.788,41.376 ; IC2.2@40.176,40.136 40.176,41.376 ; C5.2 40.676,43.008 40.676,41.6 ; IC2.1@40.676,40.136 40.676,41.6 ; 39.788,41.376 40.176,41.376 ; 40.176,41.376 40.4,41.6 40.676,41.6
  Top Layer w0.5: C5.2@40.676,43.008 40.684,43 L1.2
NetC7_2: C7.2 IC2.7 R10.2 | length 6.2
  Top Layer w0.254: IC2.7@39.176,35.736 39.176,34.224 39.5,33.9 40.6,33.9 40.7,33.8 R10.2 40.7,31 C7.2@40.8,30.9
NetC10_2: C10.2 IC4.6 IC4.7 R11.1 TP5.1 | length 17
  Top Layer w0.254: C10.2@18.85,37.482 C10.2@19.498,36.834 ; C10.2 19.135,34.54 19.783,33.892 22.794,33.892 ; R11.1@19.498,31.979 R11.1 ; TP5.1 19.55,29.927 R11.1 ; IC4.6 22.794,33.892 ; IC4.7 23.444,33.808 ; R11.1 21.57,31.927 23.444,33.801 23.444,33.808 ; 22.794,33.892 22.878,33.808 23.444,33.808
NetFL1_2: FL1.1@33.23,20.42 FL1.2@27.71,17.878 R1.2 | length 10.3
  Top Layer w0.254: R1.2 FL1.2@27.532,17.7 ; FL1.2@27.71,17.878 30.628,17.878 31.93,19.18 FL1.1@33.17,20.42
  Top Layer w0.5: FL1.2@27.532,17.7 FL1.2@27.71,17.878 ; FL1.1@33.17,20.42 FL1.1@33.23,20.42
NetFL1_9: FL1.8@43.77,5.18 FL1.9 J2.1 | length 13.3
  Top Layer w0.254: FL1.8@43.83,5.18 46.368,7.718 FL1.9 49.518,7.5 J2.1
  Top Layer w0.5: FL1.8@43.77,5.18 FL1.8@43.83,5.18
NetIC1_7: IC1.7 R4.2 | length 2.3
  Top Layer w0.254: IC1.7 19.725,16.375 20,16.1 R4.2
NetIC1_9: IC1.9 IC1.10 R1.1 | length 5.4
  Top Layer w0.254: IC1.9 20.25,17.275 20.7,17.725 ; IC1.10 20.7,17.725 ; R1.1 22.075,17.725 20.7,17.725
NetIC1_12: IC1.12 R5.2 | length 2.3
  Top Layer w0.254: IC1.12 19.725,18.625 19.8,18.7 19.8,19.8 R5.2
NetJ1_1: J1.1 TR1.3 | length 17.5
  Top Layer w0.254: TR1.3 1.027,14.773 0.8,15 0.8,25.6 1.5,26.3 J1.1
NetJ1_2: J1.2 TR1.1 TR1.2 | length 6.6
  Top Layer w0.254: J1.2@2.66,23.76 2.913,23.507 TR1.1 TR1.2
NetJ3_1: J3.1 L1.1 TP2.1 | length 13.5
  Top Layer w0.5: TP2.1 L1.1 44.5,41.4 45,40.9 45,33.943 45.416,33.528 J3.1
NetJ4_1: J4.1 RT1.2 | length 9.3
  Top Layer w0.254: J4.1 19.6,7.5 21.9,9.8 RT1.2
NetJ4_2: J4.2 RT1.1 | length 8.9
  Top Layer w0.254: J4.2 22.14,7.54 23.5,8.9 RT1.1
NetR11_2: R11.2
P3V3: C3.2 C4.2 C8.2 IC1.2 IC1.11 IC3.9 IC3.10 R6.2 R8.2 TP4.1 | length 85.8
  Top Layer w0.254: IC1.2 14.425,18.175 14.2,18.4 C3.2 14.1,19 13.4,19 13,19.4 13,21.6 ; R6.2 16.2,25.5 15.148,25.5 13,23.352 13,21.6 ; R8.2 7.2,12.3 5.021,14.479 5.021,21.021 5.6,21.6 13,21.6 ; IC1.11 20.975,18.175 21.2,18.4 21.2,19.3 C4.2 22.9,19.6 23.581,20.281 TP4.1@23.581,25.419 ; IC3.9 30.582,34.118 30.7,34 31.1,34 ; IC3.10 31.082,34.018 31.1,34 ; 31.488,34 31.1,34
  Top Layer w0.5: 16.2,25.5 TP4.1 23.581,25.419 25.113,23.887 31.907,23.887 32.2,24.18 32.2,26.2 ; C8.2 32.2,26.2 ; 31.488,34 32.3,33.188 32.3,28 32.2,27.9 32.2,26.2
P5V0: "DAC Board.2" C6.2 C9.2 C11.2 IC2.9 IC2.10 IC3.1 IC3.2 IC3.3 IC3.6 IC4.1 IC4.2 J5.2 TP1.1 | length 114.7
  Top Layer w0.254: IC4.2 23.444,40.774 23.478,40.808 24.094,40.808 ; IC4.1 24.094,40.808 ; C11.2@24.292,42.054 24.267,42.054 23.919,41.706 C11.2 24.094,41.506 24.094,40.808 ; 26.921,43.4 26.921,37.119 28.159,35.88 29.059,35.88 29.082,35.857 IC3.6 ; IC3.3 30.082,40.873 30.27,41.061 30.331,41 30.7,41 ; IC3.2 30.582,40.882 30.7,41 ; C9.2 31.082,41.562 31.082,41 ; IC3.1 31.082,41 ; IC2.9@40.176,35.736 40.176,34.624 40.3,34.5 40.7,34.5 40.676,34.524 IC2.10@40.676,35.736 ; 30.7,41 31.082,41
  Top Layer w0.5: 11.38,45.325 11.38,46 ; 30.8,43.4 30.9,43.3 31.1,43.5 ; C9.2 C9.2@30.9,41.856 ; 33.17,43.5 33.23,43.44 ; C6.2@40.694,28.5 42.1,28.5 42.6,29 42.6,34.3 42.4,34.5 40.7,34.5
  Top Layer w0.7: J5.2@4.273,39.408 5.463,39.408 11.38,45.325 ; C11.2@24.292,42.054 25.638,43.4 26.921,43.4 30.8,43.4 ; C9.2@30.9,41.856 30.9,43.3 ; 31.1,43.5 33.17,43.5 33.9,43.5 34.8,42.6 34.8,26.2 36.1,24.9 40.2,24.9 41,25.7 C6.2 ; v2(33.23,42.054) 33.23,43.44
  Bottom Layer w0.5: J5.2@4.273,39.408 J5.2@4.865,40 ; 19.102,41.044 19.102,41.102
  Bottom Layer w0.7: J5.2@4.865,40 18.059,40 19.102,41.044 ; 19.102,41.102 22,44 31.284,44 v2(33.23,42.054)
REF: 
"Vset 3V3": 
Vset_3V3: "DAC Board.4" "DAC Board.6" C12.2 IC3.7 R12.2 R13.1 R13.2 TP6.1 | length 76.9
  Top Layer w0.254: R13.1@15.8,29.927 15.8,31.645 TP6.1 ; 16.46,46 16.46,45.219 9.14,37.899 9.14,34.314 15.651,27.803 17.4,27.803 ; R13.2@17.4,29.927 17.4,27.803 ; 17.95,31.927 16.082,31.927 TP6.1 ; 21.54,46 21.54,44.976 19.564,43 15.601,43 10.99,38.389 10.99,33.91 13.046,31.854 TP6.1 ; IC3.7 29.582,33.85 30.382,33.05 R12.2 30.382,29.232 30.082,28.932 30.082,28.107 29.778,27.803 17.4,27.803
pads on no net: FL1.6@27.71,7.718 FL1.13 FTG1.FTG2 FTG2.1 FTG3.1 IC2.4 IC3.4

## Polygon pours and split planes (outlines as drawn)
GND on Bottom Layer "Bottom Layer-GND" (solid, pour order 100): 0,50 60,50 60,0 0,0
NetJ1_2 on Bottom Layer "NETJ1_2_L02_P002" (solid, remove dead copper, pour order 2): 1.3,22.5 9.1,22.5 9.1,30 9,30.1 1.4,30.1
GND on Bottom Layer "GND_L02_P012" (solid, pour order 12): 10.1,23.1 10.2,23 30.1,23 30.1,9 29.7,8.6 10.1,8.6
GND on Top Layer "Top Layer-GND" (solid, pour order 102): 0,50 60,50 60,0 0,0
NetJ1_2 on Top Layer "NETJ1_2_L01_P006" (solid, pour order 6): 1.188,22.343 9.357,22.343 9.4,22.3 9.4,30.7 1.2,30.7

## Other copper
Bottom Layer:
  region net GND: 0.306,44.595

## Silkscreen, mask and mechanical layers (free items; w line width, h text height)
Top Overlay:
  text "Ref" at 14.2,42.854 h0.75 r45
  text "Tune" at 18.5,42.6 h0.75 r42.6
  text "P5V0" at 8.473,42 h0.75 r48.41
  text "Squareatron 5000 v1.1 - TPH/Oxford + JMM/Oregon Jan 2020" at 18.5,1 h0.75
Mechanical 1:
  lines w0.254: 0,0 60,0 60,50 0,50 0,0

## Text inside footprints (layer, text, board x,y; h text height)
J3: Mechanical 8 "2.5mm" at 62.46,34.2 h1 r90; Mechanical 8 "SLEEVE SHUNT" at 53.485,41.725 h0.5 r180; Mechanical 8 "CENTER PIN" at 52.385,33.8 h0.5 r180
J4: Top Overlay "1" at 19.38,7.195 h1; Mechanical 14 "1" at 19.38,7.195 h1
J5: Top Overlay "1" at 5.51,42.328 h1 r270; Mechanical 14 "1" at 5.51,42.328 h1 r270